# Altium PCB StepCounter_sensor.PcbDoc
Units mm, origin at the board's own origin, x right, y up, seen from the top; angles counter-clockwise.
Board outline 78.99 x 31.5 mm, 2 copper layers (Top Layer, Bottom Layer); 22 components, 13 nets, 79 pads, 2 vias.
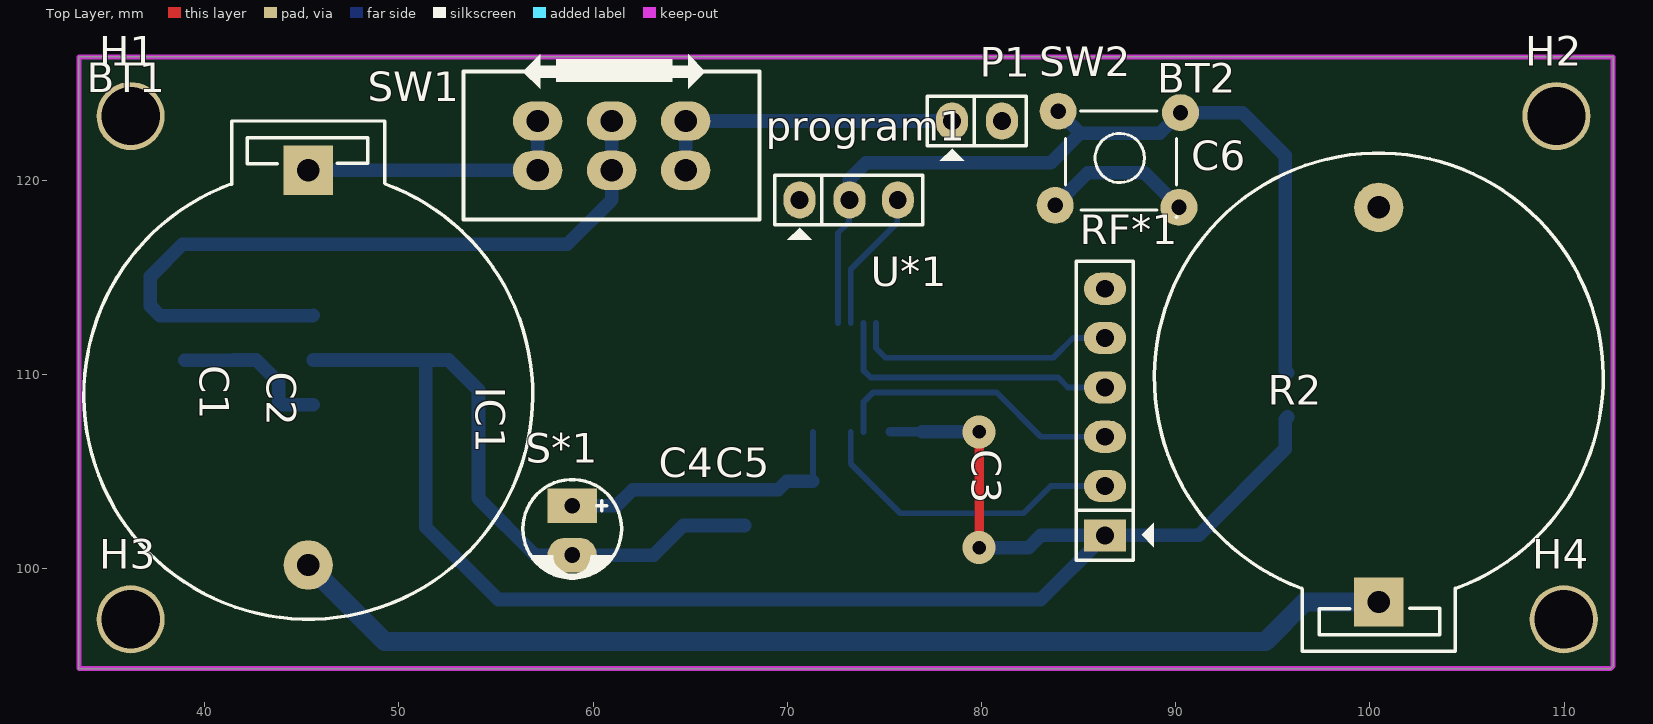
[diagram p0: Top Layer view]
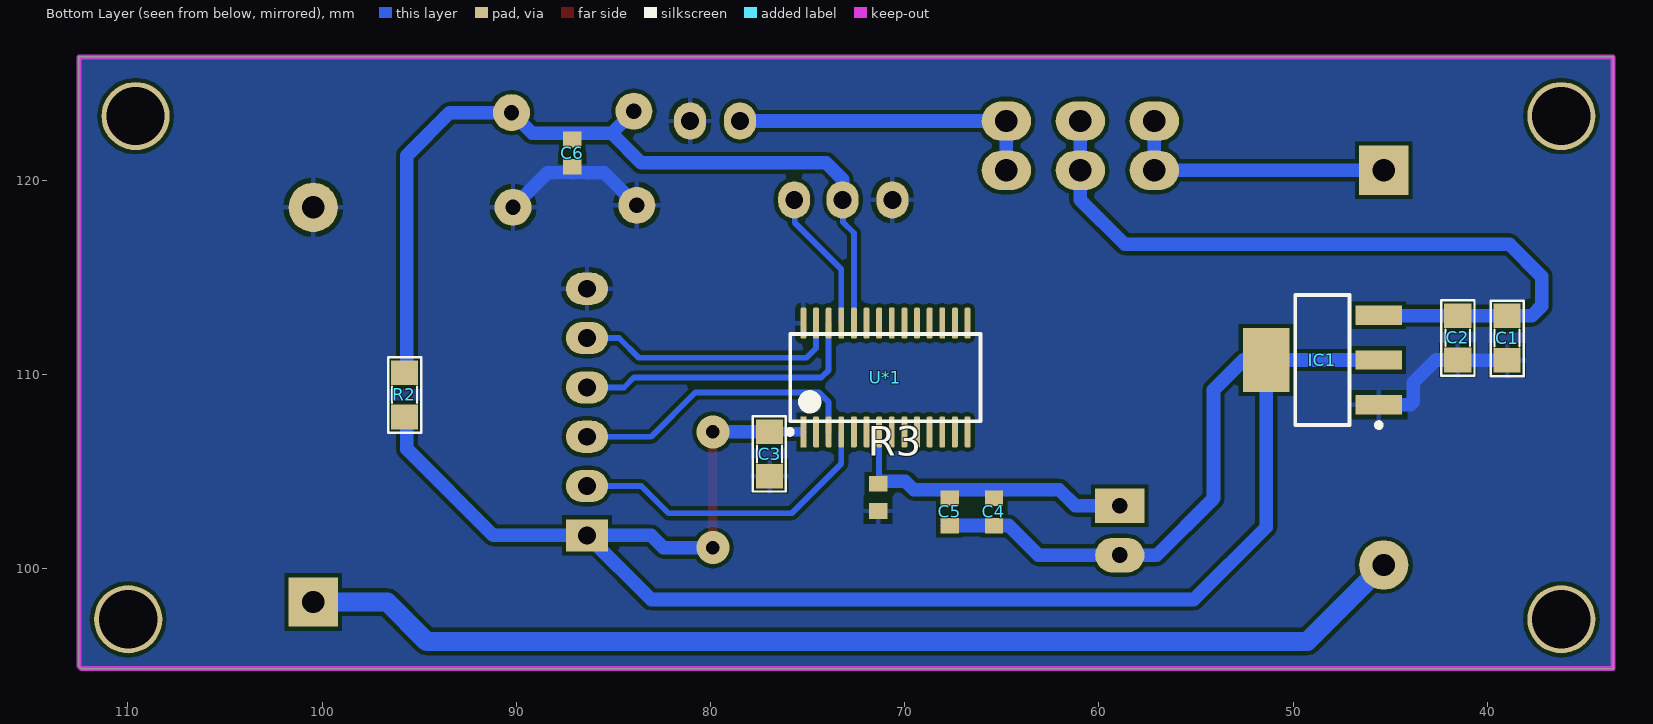
[diagram p1: Bottom Layer view, seen from below]
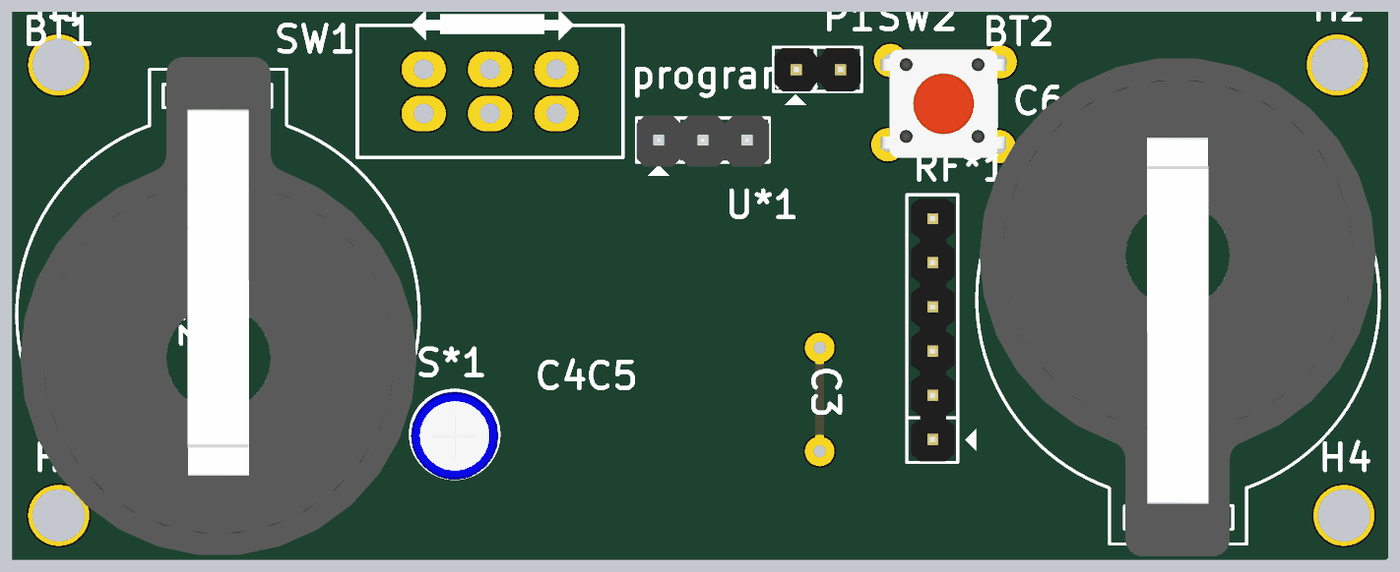
[diagram p2: 3D render of the assembled board from above, using the file's embedded part models]
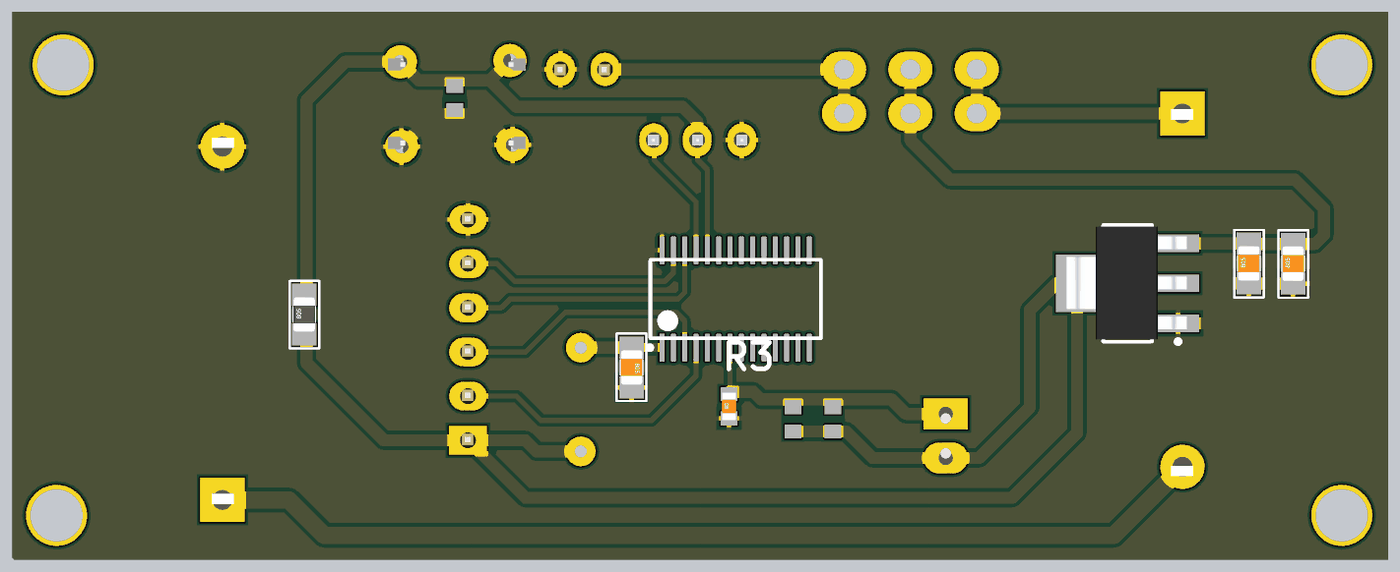
[diagram p3: 3D render of the assembled board from below, using the file's embedded part models]

## Layer stack, top to bottom
Top Solder: solder mask 0.0102, Solder Resist, Dk 3.5
Top Layer: signal copper 0.0356
Dielectric 1: dielectric 0.32, FR-4, Dk 4.8
Bottom Layer: signal copper 0.0356
Bottom Solder: solder mask 0.0102, Solder Resist, Dk 3.5

## Board outline
33.528,94.869 33.528,126.365 112.522,126.365 112.522,94.996 112.395,94.869

## Design rules (kind name [scope] priority, off if disabled: settings)
Clearance [All] p1: gap=0.2 ignorepadtopadclearanceinfootprint=FALSE
PolygonConnect [All] p1: connectstyle=Relief reliefconductorwidth=0.254 reliefentries=4 polygonreliefangle="90 Angle" airgapwidth=0.254
RoutingVias [All] p1: holewidth=0.711 width=1.27 viastyle="Through Hole" minholewidth=0.711 minwidth=1.27 maxholewidth=0.711 maxwidth=1.27
SolderMaskExpansion [All] p1: expansion=0.102
UnRoutedNet [All] p1: checkbadconnections=TRUE
Width [All] p1: maxlimit=0.7 minlimit=0.5 preferedwidth=0.7 toplayer_maxwidth=0.5 toplayer_prefwidth=0.5 bottomlayer_minwidth=0.7 minimp=50.000000 maximp=50.000000 favimp=50.000000
29 further rules are at their usual default settings.

## Components (designator, comment, footprint, x,y, rotation, side; value= is the part's Value field where it differs from the comment)
BT1 "PIN 3V" PIN3V 45.339,120.523 r270 top
BT2 "PIN 3V" PIN3V 100.457,98.298 r90 top
C1 "Cap Non-Pol SMD" CAP-SM-0805 38.989,110.744 r90 bottom value=22uF
C2 "Cap Non-Pol SMD" CAP-SM-0805 41.529,110.758 r90 bottom value=100pF
C3 "Cap Non-Pol SMD" CAP-SM-0805 76.962,107.061 r270 bottom value=100pF
C4 "Cap Non-Pol SMD" CAP-SM-0603 65.405,102.935 r270 bottom value=22uF
C5 "Cap Non-Pol SMD" CAP-SM-0603 67.691,102.935 r270 bottom value=100pF
C6 "Cap Non-Pol SMD" CAP-SM-0603 87.122,121.412 r270 bottom value=1nF
H1 "Hole" "LO KHOAN 3MM" 36.195,123.317 r0 top
H2 "Hole" "LO KHOAN 3MM" 109.601,123.317 r0 top
H3 "Hole" "LO KHOAN 3MM" 36.195,97.409 r0 top
H4 "Hole" "LO KHOAN 3MM" 109.982,97.409 r0 top
IC1 "LM1117" SOT223-4N 48.493,110.758 r0 bottom value=LM317
P1 "Header 2" JP2 78.486,123.063 r0 top
program1 "Header 3" JP3 73.177,118.999 r0 top
R2 "RESISTOR SMD" RES-SM-0805 95.758,107.823 r90 bottom value=47K
R3 "RESISTOR SMD" RES-SM-0603 71.374,102.997 r90 bottom value=47K
RF*1 "LC12S" JP6 86.36,101.727 r90 top
S*1 "SW520D" CP1/2 58.928,103.251 r270 top
SW1 "SWDPDT" SWDPDT_1.5X1 57.15,123.063 r0 top
SW2 "c" SW4 83.947,123.571 r0 top value="Button chip 4 pin"
U*1 "MSP430G2553" msp430g2553tsstop 70.993,109.855 r90 bottom

## Footprints (in the part's own frame and the unit in brackets; to place one, negate y for a bottom-side part, rotate by r counter-clockwise, add the part's x,y. Pads: shape width x height; smd on the part's side, far side on the other; paste and mask are expansions set on the pad)
CAP-SM-0603 [mm] "SMD Ceramic Capacitor Size 0603"
  rect 0.8x0.95 smd: 1(-0.7,0) 2(0.7,0)
  body extent -0.85,-0.45 0.85,0.45, height 0.6
CAP-SM-0805 [mil]
  rect 50x55 smd: 1(0,0) 2(90,0)
  silkscreen extent -32,-34 121,33, body extent 6,-25 84,25, height 31
CP1/2 [mil] "Tu hoa < 22uF/16>50V"
  rect 70x100 hole 32: 1(0,0)
  oval 70x100 hole 32: 2(100,0)
  silkscreen extent -53,-100 146,100, body extent -49,-99 149,99, height 287
JP2 [mil]
  oval 65x75 hole 36: 1(0,0) 2(101,0)
  silkscreen extent -50,-81 150,50, body extent -48,-50 148,48, height 323
JP3 [mil] "Jumper 3"
  oval 65x75 hole 36: 1(-100,0) 2(1,0) 3(99,0)
  silkscreen extent -150,-81 150,50, body extent -150,-60 150,55, height 355
JP6 [mil] "JP6"
  rect 65x85 hole 36: 1(0,0)
  oval 65x85 hole 36: 2(100,0) 3(200,0) 4(300,0) 5(400,0) 6(500,0)
  silkscreen extent -50,-99 556,58, body extent -48,-50 548,48, height 323
"LO KHOAN 3MM" [mil]
  round 138 hole 118.1: 1(0,0)
msp430g2553tsstop [mm] "TSOP, 28-Leads, Body 9.70x4.40mm, Pitch 0.65mm, IPC Medium Density"
  rect 1.6x0.3 smd: 1(-2.8,4.225)
  rrect50% 1.6x0.3 smd: 2(-2.8,3.575) 3(-2.8,2.925) 4(-2.8,2.275) 5(-2.8,1.625) 6(-2.8,0.975) 7(-2.8,0.325) 8(-2.8,-0.325) 9(-2.8,-0.975) 10(-2.8,-1.625) 11(-2.8,-2.275) 12(-2.8,-2.925) 13(-2.8,-3.575) 14(-2.8,-4.225) 15(2.8,-4.225) 16(2.8,-3.575) 17(2.8,-2.925) 18(2.8,-2.275) 19(2.8,-1.625) 20(2.8,-0.975) 21(2.8,-0.325) 22(2.8,0.325) 23(2.8,0.975) 24(2.8,1.625) 25(2.8,2.275) 26(2.8,2.925) 27(2.8,3.575) 28(2.8,4.225)
  silkscreen extent -2.92,-4.9 2.25,5.05, body extent -2.25,-4.9 2.25,4.9, height 1.2
PIN3V [mil] "Socket PIN 3V"
  rect 100x100 hole 45: 1(0,0)
  round 100 hole 45: 2(800,0)
  silkscreen extent -100,-455 910,455, body extent -128,-447 1002,449, height 278
RES-SM-0603 [mm]
  rect 0.8x0.95 smd: 1(-0.014,0) 2(1.386,0)
  body extent -0.11,-0.4 1.49,0.4, height 0.3
RES-SM-0805 [mil]
  rect 50x55 smd: 1(0,0) 2(90,0)
  silkscreen extent -32,-34 121,33, body extent 6,-25 84,25, height 31
SOT223-4N [mm] "SOT223, 4-Leads, Body 6.5x3.5mm, Pitch 2.3mm, Lead Span 7mm, IPC Medium Density"
  rect 2.4x1 smd: 1(-2.9,2.3) 2(-2.9,0) 3(-2.9,-2.3)
  rect 2.4x3.3 smd: 4(2.9,0)
  silkscreen extent -3.02,-3.35 1.4,3.47, body extent -3.39,-3.27 3.5,3.23, height 1.72
SW4 [mil] "SW button 4pin, 250 x250 mil"
  round 75 hole 31: 1(0,0) 2(245,-195) 3(248,-3) 4(-6,-191)
  silkscreen extent 15,-215 240,0, body extent -36,-220 276,24, height 276
SWDPDT_1.5X1 [mil] "Switch DPDT, Pin to Pin 150mil, Row to Row 100mil"
  oval 100x80 hole 45: 1(0,-100) 1(0,0) 2(150,-100) 2(150,0) 3(300,-100) 3(300,0)
  silkscreen extent -150,-200 450,135

## Part data
BT1 BT2: "Battery 3VDC"
C1 C2 C3 C4 C5 C6: "Capacitor"
H1 H2 H3 H4: "Hole 3mm"
IC1: "Available in 1.8V, 2.5V, 2.85V, 3.3V, 5V, and  Adjustable Versions"
P1: "Header, 2-Pin", LatestRevisionDate=17-Jul-2002, LatestRevisionNote="Re-released for DXP Platform.", Publisher="Altium Limited"
program1: "Header, 3-Pin", LatestRevisionDate=17-Jul-2002, LatestRevisionNote="Re-released for DXP Platform.", Publisher="Altium Limited"
R2 R3: "Resistor"
SW1: "Switch SPDT", Creat by=VanDungEvn@Gmail.com
SW2: library part SW4, "Switch button 4 pin"

## Via types
v1: diameter 1.7, hole 0.7, Top Layer to Bottom Layer, 2 vias

## Nets (pads, with @x,y where several pads share a name; then routed paths per layer and width w, separated by ;. In a path a pad name is that pad's centre, name@x,y a point inside that pad or via, vN(x,y) a via of type N, cw(c..) or ccw(c..) an arc to the next point about the centre after c; other vN are vias at no path point)
3v3: C3.1 C4.2 C5.2 IC1.2 IC1.4 R2.1 RF*1.1 S*1.2 U*1.1 | length 106.9
  Top Layer w0.5: v1(79.883,101.092) v1(79.883,107.055)
  Bottom Layer w0.5: U*1.1@75.311,107.061 C3.1
  Bottom Layer w0.7: IC1.2 IC1.4 ; C5.2@67.818,102.235 C5.2 C4.2 64.643,102.235 63.119,100.711 S*1.2 57.023,100.711 54.102,103.632 54.102,109.22 52.564,110.758 IC1.4 ; C3.1 v1@79.877,107.061 ; v1(79.883,101.092) 82.423,101.092 83.058,101.727 RF*1.1 ; R2.1 95.631,107.696 95.631,106.172 91.186,101.727 RF*1.1 ; IC1.4 51.393,102.15 55.118,98.425 83.058,98.425 RF*1.1
  Bottom Layer w1: v1@79.877,107.061 v1(79.883,107.055)
ADC: C4.1 C5.1 R3.2 S*1.1 U*1.7 | length 15.5
  Bottom Layer w0.3: R3.2@71.318,104.521 U*1.7
  Bottom Layer w0.7: S*1.1 61.214,103.251 62.041,104.078 69.531,104.078 69.974,104.521 R3.2@71.318,104.521
cs: RF*1.5 U*1.27 | length 13.7
  Bottom Layer w0.3: U*1.27 74.568,111.36 75.057,110.871 83.693,110.871 84.709,111.887 RF*1.5
GND: BT2.2 C1.1 C2.1 C3.2 C6.2 IC1.1 P1.2 program1.1 R3.1 RF*1.6 SW2.2 SW2.4 U*1.28 | length 16
  Bottom Layer w0.7: C1.1 41.515,110.744 C2.1 42.658,110.758 43.815,109.601 43.815,108.585 43.942,108.458 IC1.1 ; SW2.4 85.471,120.396 88.392,120.396 SW2.2
NetBT1_1: BT1.1 SW1.1 | length 14.4
  Bottom Layer w0.7: BT1.1 57.15,120.523 SW1.1@57.15,123.063
NetBT1_2: BT1.2 BT2.1 | length 57.6
  Bottom Layer w1: BT1.2 49.276,96.266 94.615,96.266 96.647,98.298 BT2.1
NetC1_2: C1.2 C2.2 IC1.3 SW1.2 | length 39.6
  Bottom Layer w0.7: IC1.3 45.579,113.044 C2.2 41.515,113.03 C1.2 37.719,113.03 37.211,113.538 37.211,115.062 38.862,116.713 58.674,116.713 60.96,118.999 60.96,120.523 SW1.2@60.96,123.063
NetP1_1: P1.1 SW1.3 | length 16.3
  Bottom Layer w0.7: SW1.3@64.77,120.523 64.77,123.063 P1.1
Reset: C6.1 program1.2 R2.2 SW2.1 SW2.3 U*1.24 | length 45.4
  Bottom Layer w0.3: U*1.24 72.618,117.297 73.177,117.856 program1.2@73.177,118.974
  Bottom Layer w0.7: program1.2@73.177,118.974 program1.2 73.203,120.066 74.041,120.904 83.566,120.904 85.09,122.428 ; SW2.1@83.947,123.698 SW2.1 85.09,122.428 ; R2.2 95.631,110.236 95.631,121.285 93.421,123.495 SW2.3 89.179,122.428 85.09,122.428
RX: RF*1.2 U*1.4 | length 16.4
  Bottom Layer w0.3: U*1.4 73.268,105.421 75.819,102.87 82.169,102.87 83.566,104.267 RF*1.2
set: RF*1.4 U*1.26 | length 15.2
  Bottom Layer w0.3: U*1.26 73.918,110.232 74.295,109.855 83.947,109.855 84.455,109.347 RF*1.4
test: program1.3 U*1.25 | length 7.3
  Bottom Layer w0.3: U*1.25 73.268,115.432 75.667,117.831 program1.3@75.667,118.974
  Bottom Layer w0.7: program1.3@75.667,118.974 program1.3
TX: RF*1.3 U*1.3 | length 15.1
  Bottom Layer w0.3: U*1.3 73.918,108.589 74.422,109.093 80.772,109.093 83.058,106.807 RF*1.3
pads on no net: H1.1 H2.1 H3.1 H4.1 U*1.2 U*1.5 U*1.6 U*1.8 U*1.9 U*1.10 U*1.11 U*1.12 U*1.13 U*1.14 U*1.15 U*1.16 U*1.17 U*1.18 U*1.19 U*1.20 U*1.21 U*1.22 U*1.23

## Polygon pours and split planes (outlines as drawn)
GND on Bottom Layer "GND_L02_P040" (solid, pour order 40): 33.528,126.365 112.522,126.365 112.522,94.996 112.395,94.869 33.528,94.869
GND on Bottom Layer "GND_L02_P034" (solid, pour order 34): 33.528,126.365

## Keep-outs
Keep-Out Layer:
  the board outline again, w0.254